# Altium PCB Coil Board.PcbDoc
Units mm, origin at the board's own origin, x right, y up, seen from the top; angles counter-clockwise.
Board outline 280 x 200 mm, 4 copper layers (Layer 1, Layer 2, Layer 3, Layer 4), stack 0.778 mm thick; 140 components, 0 nets, 280 pads, 420 vias.
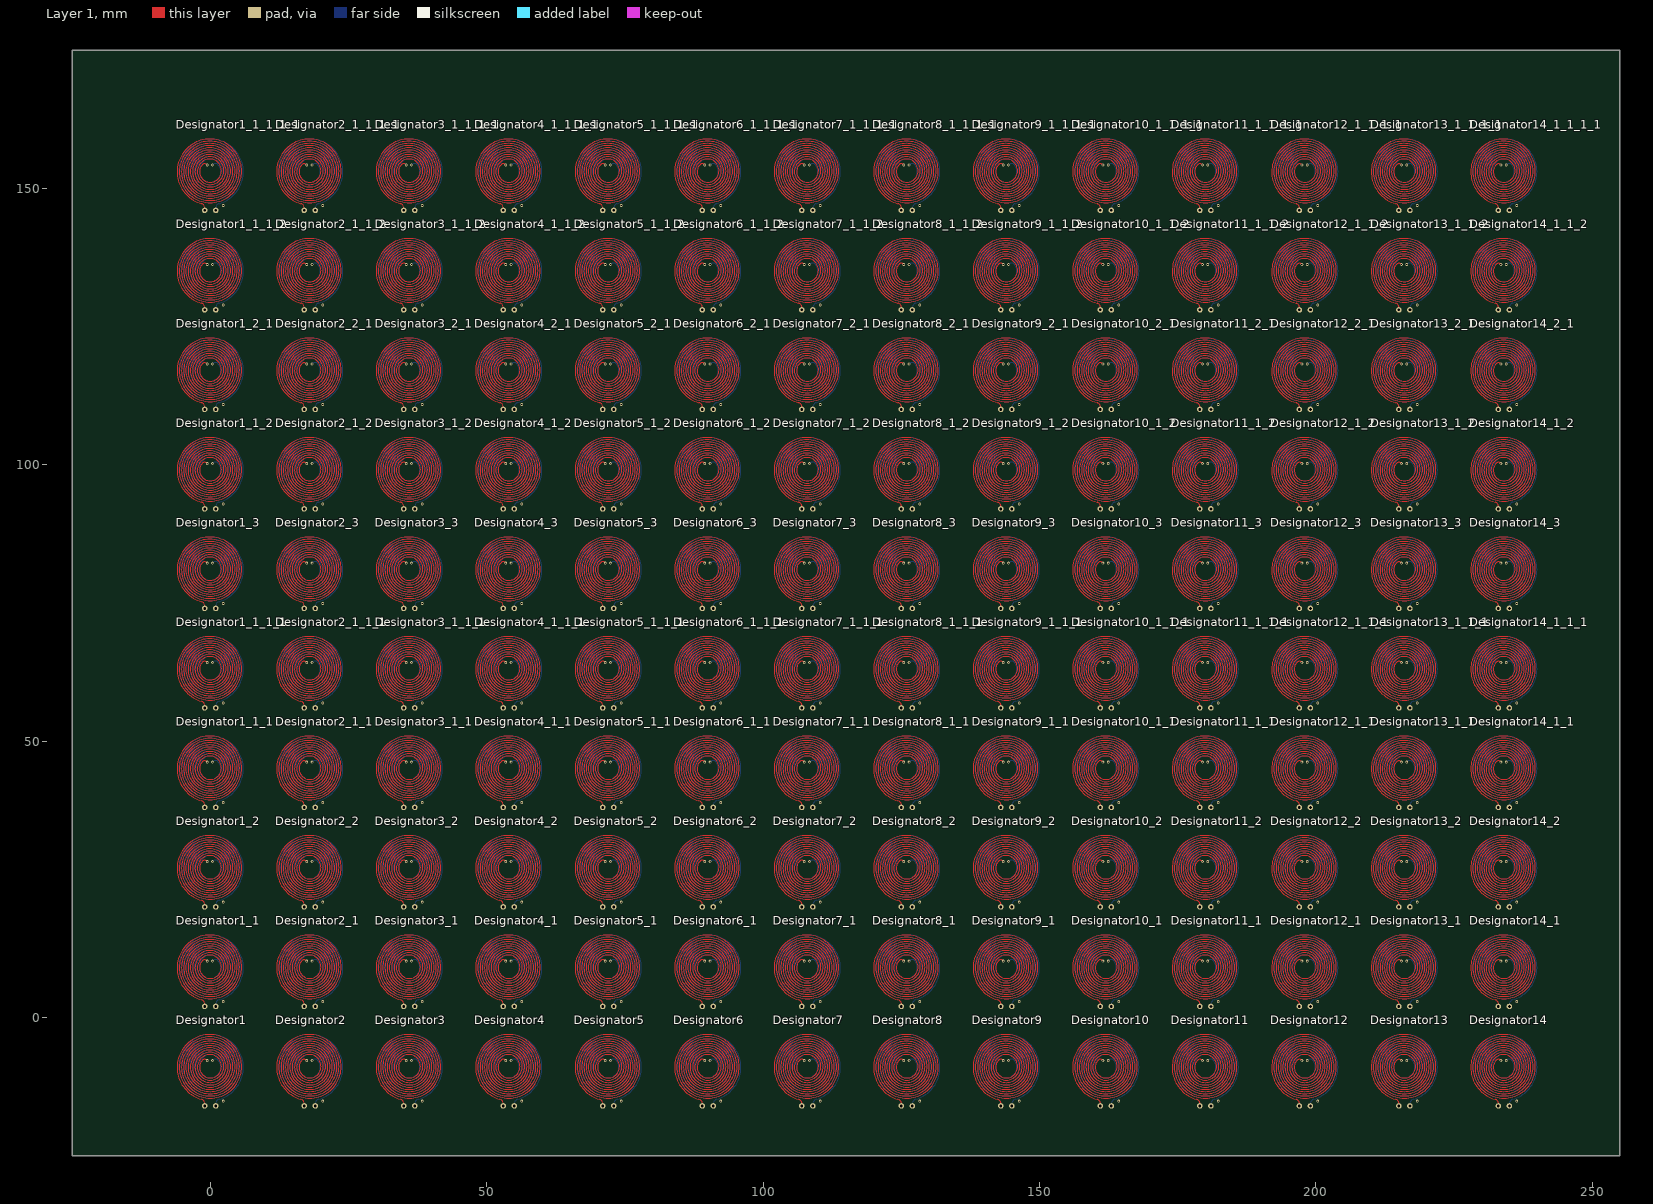
[diagram p0: Layer 1 view]
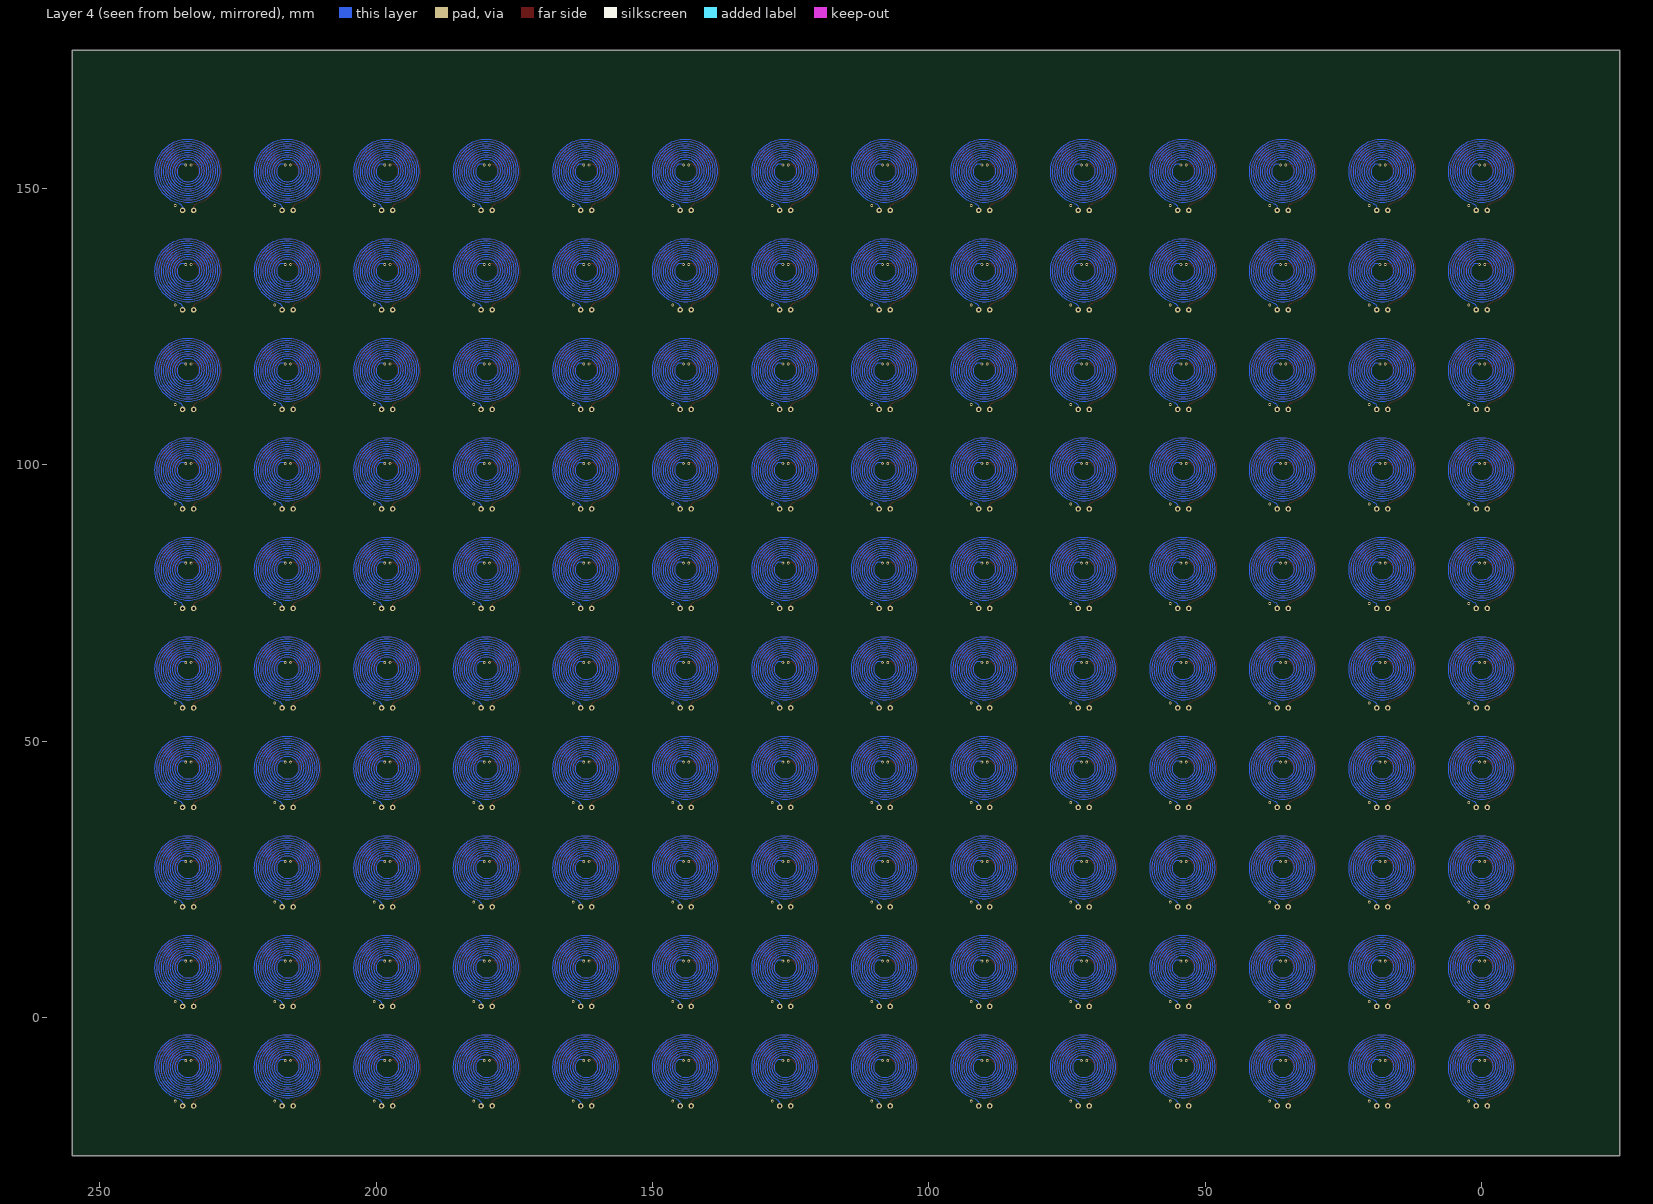
[diagram p1: Layer 4 view, seen from below]
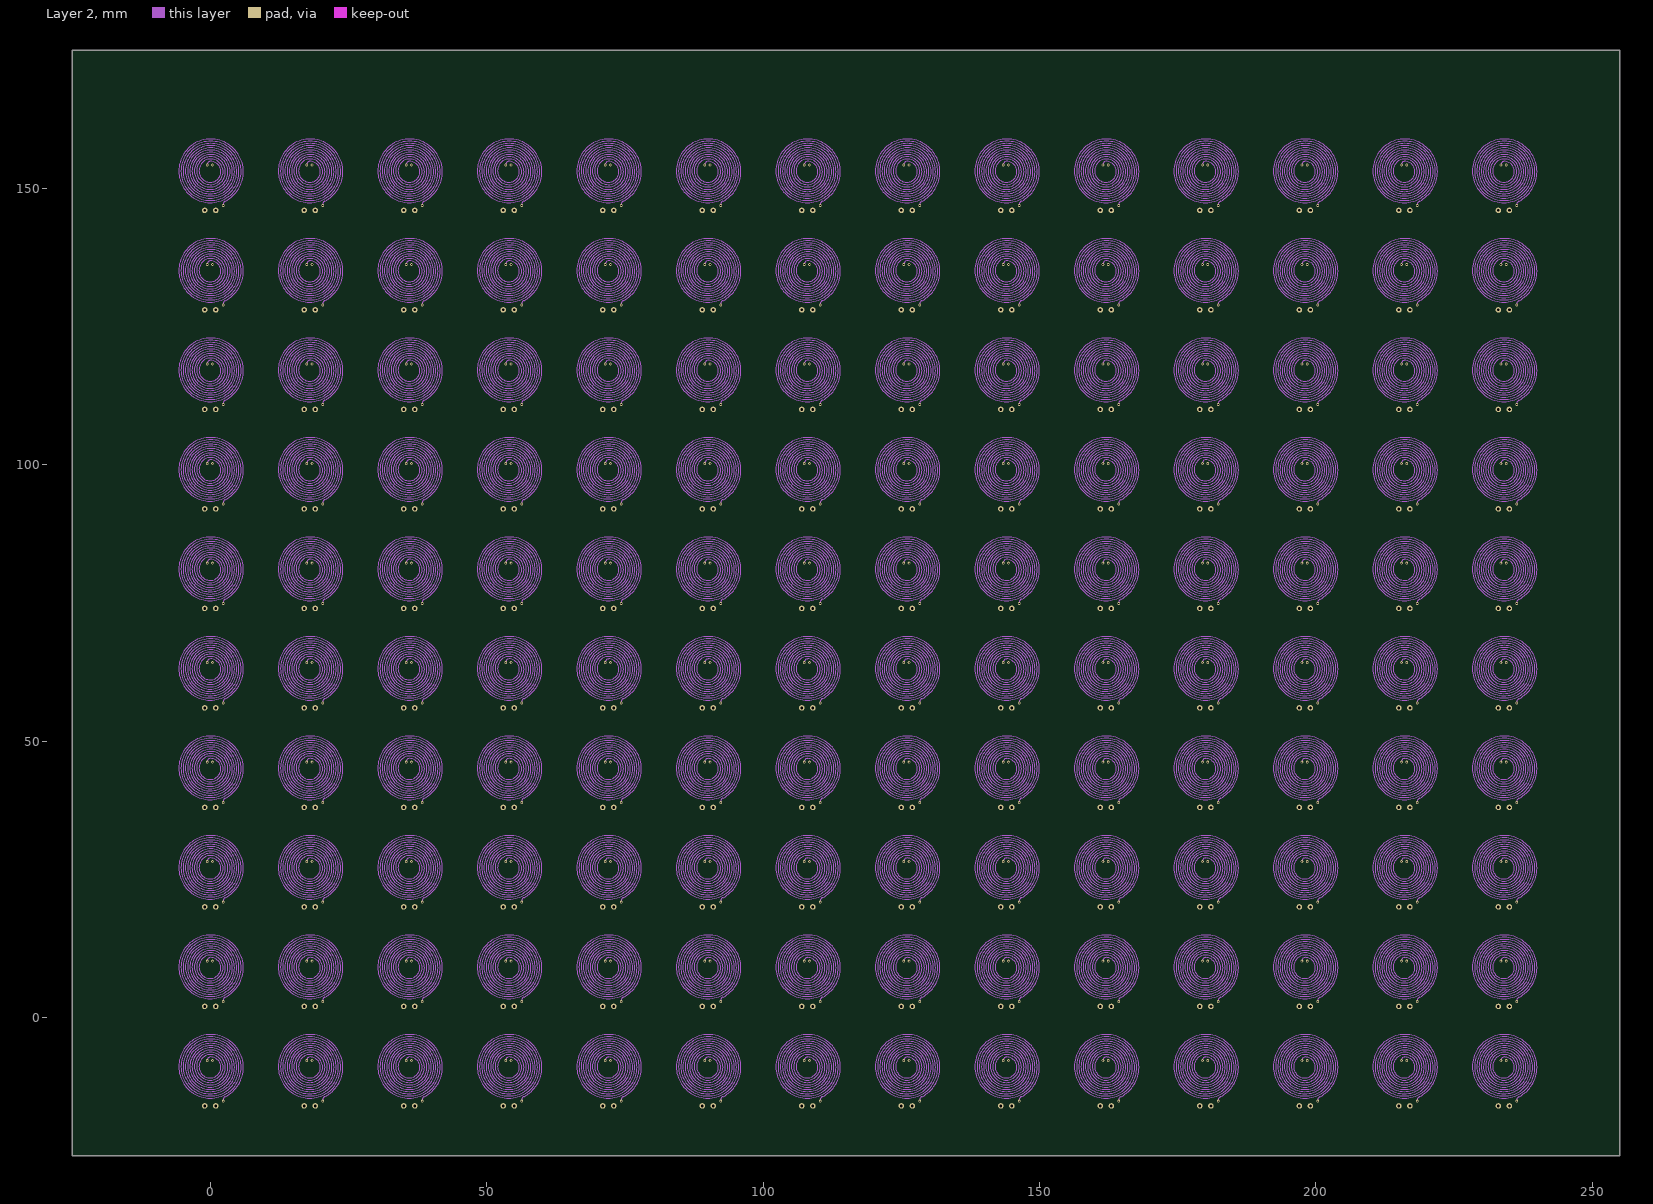
[diagram p2: Layer 2]
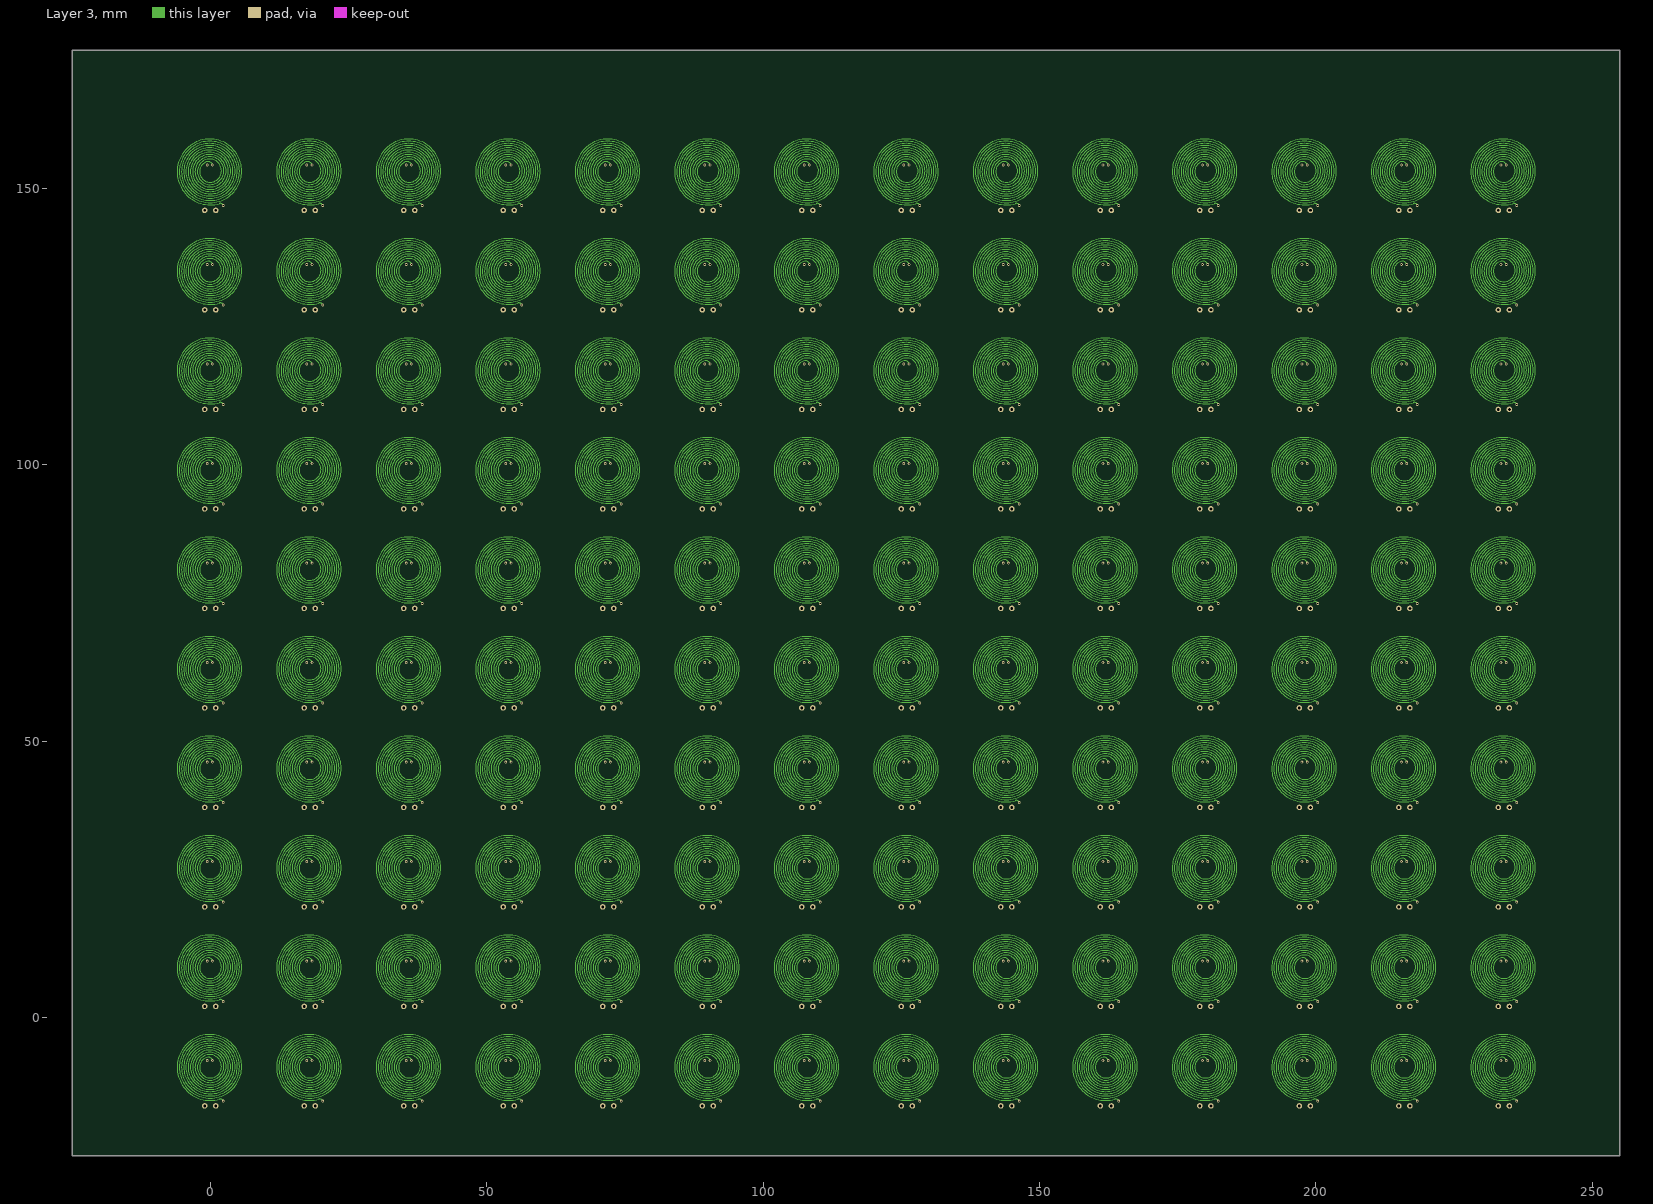
[diagram p3: Layer 3]

## Layer stack, top to bottom
Top Solder: solder mask 0.0102, Solder Resist, Dk 3.5
Layer 1: signal copper 0.0356
Dielectric 1: core 0.254, FR-4, Dk 4.2
Layer 2: signal copper 0.036
Dielectric 3: prepreg 0.127, Dk 4.2
Layer 3: signal copper 0.036
Dielectric 2: core 0.254, Dk 4.2
Layer 4: signal copper 0.0356
Bottom Solder: solder mask 0.0102, Solder Resist, Dk 3.5

## Board outline
-25,-25 255,-25 255,175 -25,175

## Design rules (kind name [scope] priority, off if disabled: settings)
Clearance [All] p1: gap=0.254 ignorepadtopadclearanceinfootprint=FALSE except(0: Arc-Hole Track-Hole SMDPad-Hole THPad-Hole Via-Hole Fill-Hole Poly-Hole Region-Hole Text-Hole)
PolygonConnect [All] p1: connectstyle=Relief reliefconductorwidth=0.254 reliefentries=4 polygonreliefangle="90 Angle" airgapwidth=0.254
RoutingVias [All] p1: holewidth=0.711 width=1.27 viastyle="Through Hole" minholewidth=0.711 minwidth=1.27 maxholewidth=0.711 maxwidth=1.27
SolderMaskExpansion [All] p1: expansion=0.102
Width [All] p1: maxlimit=0.254 minlimit=0.254 preferedwidth=0.254
30 further rules are at their usual default settings.

## Components (designator, comment, footprint, x,y, rotation, side; value= is the part's Value field where it differs from the comment)
Designator1 "Comment" "Planar Coil - 44 Turns (12.5mm)" 0,-9 r0 top
Designator1_1 "Comment" "Planar Coil - 44 Turns (12.5mm)" 0,9 r0 top
Designator1_1_1 "Comment" "Planar Coil - 44 Turns (12.5mm)" 0,45 r0 top
Designator1_1_1_1 "Comment" "Planar Coil - 44 Turns (12.5mm)" 0,63 r0 top
Designator1_1_1_1_1 "Comment" "Planar Coil - 44 Turns (12.5mm)" 0,153 r0 top
Designator1_1_1_2 "Comment" "Planar Coil - 44 Turns (12.5mm)" 0,135 r0 top
Designator1_1_2 "Comment" "Planar Coil - 44 Turns (12.5mm)" 0,99 r0 top
Designator1_2 "Comment" "Planar Coil - 44 Turns (12.5mm)" 0,27 r0 top
Designator1_2_1 "Comment" "Planar Coil - 44 Turns (12.5mm)" 0,117 r0 top
Designator1_3 "Comment" "Planar Coil - 44 Turns (12.5mm)" 0,81 r0 top
Designator2 "Comment" "Planar Coil - 44 Turns (12.5mm)" 18,-9 r0 top
Designator2_1 "Comment" "Planar Coil - 44 Turns (12.5mm)" 18,9 r0 top
Designator2_1_1 "Comment" "Planar Coil - 44 Turns (12.5mm)" 18,45 r0 top
Designator2_1_1_1 "Comment" "Planar Coil - 44 Turns (12.5mm)" 18,63 r0 top
Designator2_1_1_1_1 "Comment" "Planar Coil - 44 Turns (12.5mm)" 18,153 r0 top
Designator2_1_1_2 "Comment" "Planar Coil - 44 Turns (12.5mm)" 18,135 r0 top
Designator2_1_2 "Comment" "Planar Coil - 44 Turns (12.5mm)" 18,99 r0 top
Designator2_2 "Comment" "Planar Coil - 44 Turns (12.5mm)" 18,27 r0 top
Designator2_2_1 "Comment" "Planar Coil - 44 Turns (12.5mm)" 18,117 r0 top
Designator2_3 "Comment" "Planar Coil - 44 Turns (12.5mm)" 18,81 r0 top
Designator3 "Comment" "Planar Coil - 44 Turns (12.5mm)" 36,-9 r0 top
Designator3_1 "Comment" "Planar Coil - 44 Turns (12.5mm)" 36,9 r0 top
Designator3_1_1 "Comment" "Planar Coil - 44 Turns (12.5mm)" 36,45 r0 top
Designator3_1_1_1 "Comment" "Planar Coil - 44 Turns (12.5mm)" 36,63 r0 top
Designator3_1_1_1_1 "Comment" "Planar Coil - 44 Turns (12.5mm)" 36,153 r0 top
Designator3_1_1_2 "Comment" "Planar Coil - 44 Turns (12.5mm)" 36,135 r0 top
Designator3_1_2 "Comment" "Planar Coil - 44 Turns (12.5mm)" 36,99 r0 top
Designator3_2 "Comment" "Planar Coil - 44 Turns (12.5mm)" 36,27 r0 top
Designator3_2_1 "Comment" "Planar Coil - 44 Turns (12.5mm)" 36,117 r0 top
Designator3_3 "Comment" "Planar Coil - 44 Turns (12.5mm)" 36,81 r0 top
Designator4 "Comment" "Planar Coil - 44 Turns (12.5mm)" 54,-9 r0 top
Designator4_1 "Comment" "Planar Coil - 44 Turns (12.5mm)" 54,9 r0 top
Designator4_1_1 "Comment" "Planar Coil - 44 Turns (12.5mm)" 54,45 r0 top
Designator4_1_1_1 "Comment" "Planar Coil - 44 Turns (12.5mm)" 54,63 r0 top
Designator4_1_1_1_1 "Comment" "Planar Coil - 44 Turns (12.5mm)" 54,153 r0 top
Designator4_1_1_2 "Comment" "Planar Coil - 44 Turns (12.5mm)" 54,135 r0 top
Designator4_1_2 "Comment" "Planar Coil - 44 Turns (12.5mm)" 54,99 r0 top
Designator4_2 "Comment" "Planar Coil - 44 Turns (12.5mm)" 54,27 r0 top
Designator4_2_1 "Comment" "Planar Coil - 44 Turns (12.5mm)" 54,117 r0 top
Designator4_3 "Comment" "Planar Coil - 44 Turns (12.5mm)" 54,81 r0 top
Designator5 "Comment" "Planar Coil - 44 Turns (12.5mm)" 72,-9 r0 top
Designator5_1 "Comment" "Planar Coil - 44 Turns (12.5mm)" 72,9 r0 top
Designator5_1_1 "Comment" "Planar Coil - 44 Turns (12.5mm)" 72,45 r0 top
Designator5_1_1_1 "Comment" "Planar Coil - 44 Turns (12.5mm)" 72,63 r0 top
Designator5_1_1_1_1 "Comment" "Planar Coil - 44 Turns (12.5mm)" 72,153 r0 top
Designator5_1_1_2 "Comment" "Planar Coil - 44 Turns (12.5mm)" 72,135 r0 top
Designator5_1_2 "Comment" "Planar Coil - 44 Turns (12.5mm)" 72,99 r0 top
Designator5_2 "Comment" "Planar Coil - 44 Turns (12.5mm)" 72,27 r0 top
Designator5_2_1 "Comment" "Planar Coil - 44 Turns (12.5mm)" 72,117 r0 top
Designator5_3 "Comment" "Planar Coil - 44 Turns (12.5mm)" 72,81 r0 top
Designator6 "Comment" "Planar Coil - 44 Turns (12.5mm)" 90,-9 r0 top
Designator6_1 "Comment" "Planar Coil - 44 Turns (12.5mm)" 90,9 r0 top
Designator6_1_1 "Comment" "Planar Coil - 44 Turns (12.5mm)" 90,45 r0 top
Designator6_1_1_1 "Comment" "Planar Coil - 44 Turns (12.5mm)" 90,63 r0 top
Designator6_1_1_1_1 "Comment" "Planar Coil - 44 Turns (12.5mm)" 90,153 r0 top
Designator6_1_1_2 "Comment" "Planar Coil - 44 Turns (12.5mm)" 90,135 r0 top
Designator6_1_2 "Comment" "Planar Coil - 44 Turns (12.5mm)" 90,99 r0 top
Designator6_2 "Comment" "Planar Coil - 44 Turns (12.5mm)" 90,27 r0 top
Designator6_2_1 "Comment" "Planar Coil - 44 Turns (12.5mm)" 90,117 r0 top
Designator6_3 "Comment" "Planar Coil - 44 Turns (12.5mm)" 90,81 r0 top
Designator7 "Comment" "Planar Coil - 44 Turns (12.5mm)" 108,-9 r0 top
Designator7_1 "Comment" "Planar Coil - 44 Turns (12.5mm)" 108,9 r0 top
Designator7_1_1 "Comment" "Planar Coil - 44 Turns (12.5mm)" 108,45 r0 top
Designator7_1_1_1 "Comment" "Planar Coil - 44 Turns (12.5mm)" 108,63 r0 top
Designator7_1_1_1_1 "Comment" "Planar Coil - 44 Turns (12.5mm)" 108,153 r0 top
Designator7_1_1_2 "Comment" "Planar Coil - 44 Turns (12.5mm)" 108,135 r0 top
Designator7_1_2 "Comment" "Planar Coil - 44 Turns (12.5mm)" 108,99 r0 top
Designator7_2 "Comment" "Planar Coil - 44 Turns (12.5mm)" 108,27 r0 top
Designator7_2_1 "Comment" "Planar Coil - 44 Turns (12.5mm)" 108,117 r0 top
Designator7_3 "Comment" "Planar Coil - 44 Turns (12.5mm)" 108,81 r0 top
Designator8 "Comment" "Planar Coil - 44 Turns (12.5mm)" 126,-9 r0 top
Designator8_1 "Comment" "Planar Coil - 44 Turns (12.5mm)" 126,9 r0 top
Designator8_1_1 "Comment" "Planar Coil - 44 Turns (12.5mm)" 126,45 r0 top
Designator8_1_1_1 "Comment" "Planar Coil - 44 Turns (12.5mm)" 126,63 r0 top
Designator8_1_1_1_1 "Comment" "Planar Coil - 44 Turns (12.5mm)" 126,153 r0 top
Designator8_1_1_2 "Comment" "Planar Coil - 44 Turns (12.5mm)" 126,135 r0 top
Designator8_1_2 "Comment" "Planar Coil - 44 Turns (12.5mm)" 126,99 r0 top
Designator8_2 "Comment" "Planar Coil - 44 Turns (12.5mm)" 126,27 r0 top
Designator8_2_1 "Comment" "Planar Coil - 44 Turns (12.5mm)" 126,117 r0 top
Designator8_3 "Comment" "Planar Coil - 44 Turns (12.5mm)" 126,81 r0 top
Designator9 "Comment" "Planar Coil - 44 Turns (12.5mm)" 144,-9 r0 top
Designator9_1 "Comment" "Planar Coil - 44 Turns (12.5mm)" 144,9 r0 top
Designator9_1_1 "Comment" "Planar Coil - 44 Turns (12.5mm)" 144,45 r0 top
Designator9_1_1_1 "Comment" "Planar Coil - 44 Turns (12.5mm)" 144,63 r0 top
Designator9_1_1_1_1 "Comment" "Planar Coil - 44 Turns (12.5mm)" 144,153 r0 top
Designator9_1_1_2 "Comment" "Planar Coil - 44 Turns (12.5mm)" 144,135 r0 top
Designator9_1_2 "Comment" "Planar Coil - 44 Turns (12.5mm)" 144,99 r0 top
Designator9_2 "Comment" "Planar Coil - 44 Turns (12.5mm)" 144,27 r0 top
Designator9_2_1 "Comment" "Planar Coil - 44 Turns (12.5mm)" 144,117 r0 top
Designator9_3 "Comment" "Planar Coil - 44 Turns (12.5mm)" 144,81 r0 top
Designator10 "Comment" "Planar Coil - 44 Turns (12.5mm)" 162,-9 r0 top
Designator10_1 "Comment" "Planar Coil - 44 Turns (12.5mm)" 162,9 r0 top
Designator10_1_1 "Comment" "Planar Coil - 44 Turns (12.5mm)" 162,45 r0 top
Designator10_1_1_1 "Comment" "Planar Coil - 44 Turns (12.5mm)" 162,63 r0 top
Designator10_1_1_1_1 "Comment" "Planar Coil - 44 Turns (12.5mm)" 162,153 r0 top
Designator10_1_1_2 "Comment" "Planar Coil - 44 Turns (12.5mm)" 162,135 r0 top
Designator10_1_2 "Comment" "Planar Coil - 44 Turns (12.5mm)" 162,99 r0 top
Designator10_2 "Comment" "Planar Coil - 44 Turns (12.5mm)" 162,27 r0 top
Designator10_2_1 "Comment" "Planar Coil - 44 Turns (12.5mm)" 162,117 r0 top
Designator10_3 "Comment" "Planar Coil - 44 Turns (12.5mm)" 162,81 r0 top
Designator11 "Comment" "Planar Coil - 44 Turns (12.5mm)" 180,-9 r0 top
Designator11_1 "Comment" "Planar Coil - 44 Turns (12.5mm)" 180,9 r0 top
Designator11_1_1 "Comment" "Planar Coil - 44 Turns (12.5mm)" 180,45 r0 top
Designator11_1_1_1 "Comment" "Planar Coil - 44 Turns (12.5mm)" 180,63 r0 top
Designator11_1_1_1_1 "Comment" "Planar Coil - 44 Turns (12.5mm)" 180,153 r0 top
Designator11_1_1_2 "Comment" "Planar Coil - 44 Turns (12.5mm)" 180,135 r0 top
Designator11_1_2 "Comment" "Planar Coil - 44 Turns (12.5mm)" 180,99 r0 top
Designator11_2 "Comment" "Planar Coil - 44 Turns (12.5mm)" 180,27 r0 top
Designator11_2_1 "Comment" "Planar Coil - 44 Turns (12.5mm)" 180,117 r0 top
Designator11_3 "Comment" "Planar Coil - 44 Turns (12.5mm)" 180,81 r0 top
Designator12 "Comment" "Planar Coil - 44 Turns (12.5mm)" 198,-9 r0 top
Designator12_1 "Comment" "Planar Coil - 44 Turns (12.5mm)" 198,9 r0 top
Designator12_1_1 "Comment" "Planar Coil - 44 Turns (12.5mm)" 198,45 r0 top
Designator12_1_1_1 "Comment" "Planar Coil - 44 Turns (12.5mm)" 198,63 r0 top
Designator12_1_1_1_1 "Comment" "Planar Coil - 44 Turns (12.5mm)" 198,153 r0 top
Designator12_1_1_2 "Comment" "Planar Coil - 44 Turns (12.5mm)" 198,135 r0 top
Designator12_1_2 "Comment" "Planar Coil - 44 Turns (12.5mm)" 198,99 r0 top
Designator12_2 "Comment" "Planar Coil - 44 Turns (12.5mm)" 198,27 r0 top
Designator12_2_1 "Comment" "Planar Coil - 44 Turns (12.5mm)" 198,117 r0 top
Designator12_3 "Comment" "Planar Coil - 44 Turns (12.5mm)" 198,81 r0 top
Designator13 "Comment" "Planar Coil - 44 Turns (12.5mm)" 216,-9 r0 top
Designator13_1 "Comment" "Planar Coil - 44 Turns (12.5mm)" 216,9 r0 top
Designator13_1_1 "Comment" "Planar Coil - 44 Turns (12.5mm)" 216,45 r0 top
Designator13_1_1_1 "Comment" "Planar Coil - 44 Turns (12.5mm)" 216,63 r0 top
Designator13_1_1_1_1 "Comment" "Planar Coil - 44 Turns (12.5mm)" 216,153 r0 top
Designator13_1_1_2 "Comment" "Planar Coil - 44 Turns (12.5mm)" 216,135 r0 top
Designator13_1_2 "Comment" "Planar Coil - 44 Turns (12.5mm)" 216,99 r0 top
Designator13_2 "Comment" "Planar Coil - 44 Turns (12.5mm)" 216,27 r0 top
Designator13_2_1 "Comment" "Planar Coil - 44 Turns (12.5mm)" 216,117 r0 top
Designator13_3 "Comment" "Planar Coil - 44 Turns (12.5mm)" 216,81 r0 top
Designator14 "Comment" "Planar Coil - 44 Turns (12.5mm)" 234,-9 r0 top
Designator14_1 "Comment" "Planar Coil - 44 Turns (12.5mm)" 234,9 r0 top
Designator14_1_1 "Comment" "Planar Coil - 44 Turns (12.5mm)" 234,45 r0 top
Designator14_1_1_1 "Comment" "Planar Coil - 44 Turns (12.5mm)" 234,63 r0 top
Designator14_1_1_1_1 "Comment" "Planar Coil - 44 Turns (12.5mm)" 234,153 r0 top
Designator14_1_1_2 "Comment" "Planar Coil - 44 Turns (12.5mm)" 234,135 r0 top
Designator14_1_2 "Comment" "Planar Coil - 44 Turns (12.5mm)" 234,99 r0 top
Designator14_2 "Comment" "Planar Coil - 44 Turns (12.5mm)" 234,27 r0 top
Designator14_2_1 "Comment" "Planar Coil - 44 Turns (12.5mm)" 234,117 r0 top
Designator14_3 "Comment" "Planar Coil - 44 Turns (12.5mm)" 234,81 r0 top

## Footprints (in the part's own frame and the unit in brackets; to place one, negate y for a bottom-side part, rotate by r counter-clockwise, add the part's x,y. Pads: shape width x height; smd on the part's side, far side on the other; paste and mask are expansions set on the pad)
"Planar Coil - 44 Turns (12.5mm)" [mm]
  round 1 hole 0.5: 1(-1,-7) 2(1,-7)
  Layer 1 lines w0.2: -1,-7 ccw(c-1.906,-6.69) -1.596,-5.784 cw(c0,0) -6,0 cw(c-0.1,0) -0.1,5.9 cw(c-0.1,0.1) 5.7,0.1 cw(c0,0.1) 0,-5.6 cw(c0,0) -5.6,0 cw(c-0.1,0) -0.1,5.5 cw(c-0.1,0.1) 5.3,0.1 cw(c0,0.1) 0,-5.2 cw(c0,0) -5.2,0 cw(c-0.1,0) -0.1,5.1 cw(c-0.1,0.1) 4.9,0.1 cw(c0,0.1) 0,-4.8 cw(c0,0) -4.8,0 cw(c-0.1,0) -0.1,4.7 cw(c-0.1,0.1) 4.5,0.1 cw(c0,0.1) 0,-4.4 cw(c0,0) -4.4,0 cw(c-0.1,0) -0.1,4.3 cw(c-0.1,0.1) 4.1,0.1 cw(c0,0.1) 0,-4 cw(c0,0) -4,0 cw(c-0.1,0) -0.1,3.9 cw(c-0.1,0.1) 3.7,0.1 cw(c0,0.1) 0,-3.6 cw(c0,0) -3.6,0 cw(c-0.1,0) -0.1,3.5 cw(c-0.1,0.1) 3.3,0.1 cw(c0,0.1) 0,-3.2 cw(c0,0) -3.2,0 cw(c-0.1,0) -0.119,3.1 cw(c-0.11,0.11) 2.88,0.12 cw(c0,0.12) 0,-2.76 cw(c0,0) -2.76,0 cw(c-0.06,0) -0.06,2.7 cw(c-0.06,0.18) 2.46,0.18 cw(c-0.03,0.15) 0,-2.34 cw(c0,0) -2.34,0 cw(c-0.06,0) -0.06,2.28 cw(c-0.09,0.15) 2.04,0.12 cw(c0,0.12) 0,-1.92 cw(c0,0) -1.92,0 cw(c-0.06,0) -1.404,1.286 cw(c-1.015,0.811) -0.54,1.2
  Layer 2 lines w0.2: -0.54,1.2 cw(c0.09,1.23) 0.06,1.86 cw(c0.06,0) 1.92,0 cw(c0,0) 0,-1.92 cw(c0,0.12) -2.04,0.12 cw(c0.09,0.15) 0.06,2.28 cw(c0.06,0) 2.34,0 cw(c0,0) 0,-2.34 cw(c0.03,0.15) -2.46,0.18 cw(c0.06,0.18) 0.06,2.7 cw(c0.06,0) 2.76,0 cw(c0,0) 0,-2.76 cw(c0,0.12) -2.88,0.12 cw(c0.11,0.11) 0.119,3.1 cw(c0.1,0) 3.2,0 cw(c0,0) 0,-3.2 cw(c0,0.1) -3.3,0.1 cw(c0.1,0.1) 0.1,3.5 cw(c0.1,0) 3.6,0 cw(c0,0) 0,-3.6 cw(c0,0.1) -3.7,0.1 cw(c0.1,0.1) 0.1,3.9 cw(c0.1,0) 4,0 cw(c0,0) 0,-4 cw(c0,0.1) -4.1,0.1 cw(c0.1,0.1) 0.1,4.3 cw(c0.1,0) 4.4,0 cw(c0,0) 0,-4.4 cw(c0,0.1) -4.5,0.1 cw(c0.1,0.1) 0.1,4.7 cw(c0.1,0) 4.8,0 cw(c0,0) 0,-4.8 cw(c0,0.1) -4.9,0.1 cw(c0.1,0.1) 0.1,5.1 cw(c0.1,0) 5.2,0 cw(c0,0) 0,-5.2 cw(c0,0.1) -5.3,0.1 cw(c0.1,0.1) 0.1,5.5 cw(c0.1,0) 5.6,0 cw(c0,0) 0,-5.6 cw(c0,0.1) -5.7,0.1 cw(c0.1,0.1) 0.1,5.9 cw(c0.1,0) 6,0 cw(c0,0) 2.757,-5.329 ccw(c2.944,-5.933) 2.34,-6.12
  Layer 3 lines w0.2: -0.483,1.811 ccw(c-0.06,0) -1.92,0 ccw(c0,0) 0,-1.92 ccw(c0,0.12) 2.04,0.12 ccw(c-0.09,0.15) -0.06,2.28 ccw(c-0.06,0) -2.34,0 ccw(c0,0) 0,-2.34 ccw(c-0.03,0.15) 2.46,0.18 ccw(c-0.06,0.18) -0.06,2.7 ccw(c-0.06,0) -2.76,0 ccw(c0,0) 0,-2.76 ccw(c0,0.12) 2.88,0.12 ccw(c-0.11,0.11) -0.119,3.1 ccw(c-0.1,0) -3.2,0 ccw(c0,0) 0,-3.2 ccw(c0,0.1) 3.3,0.1 ccw(c-0.1,0.1) -0.1,3.5 ccw(c-0.1,0) -3.6,0 ccw(c0,0) 0,-3.6 ccw(c0,0.1) 3.7,0.1 ccw(c-0.1,0.1) -0.1,3.9 ccw(c-0.1,0) -4,0 ccw(c0,0) 0,-4 ccw(c0,0.1) 4.1,0.1 ccw(c-0.1,0.1) -0.1,4.3 ccw(c-0.1,0) -4.4,0 ccw(c0,0) 0,-4.4 ccw(c0,0.1) 4.5,0.1 ccw(c-0.1,0.1) -0.1,4.7 ccw(c-0.1,0) -4.8,0 ccw(c0,0) 0,-4.8 ccw(c0,0.1) 4.9,0.1 ccw(c-0.1,0.1) -0.1,5.1 ccw(c-0.1,0) -5.2,0 ccw(c0,0) 0,-5.2 ccw(c0,0.1) 5.3,0.1 ccw(c-0.1,0.1) -0.1,5.5 ccw(c-0.1,0) -5.6,0 ccw(c0,0) 0,-5.6 ccw(c0,0.1) 5.7,0.1 ccw(c-0.1,0.1) -0.1,5.9 ccw(c-0.1,0) -6,0 ccw(c0,0) 1.648,-5.769 cw(c1.819,-6.29) 2.34,-6.12 ; -0.48,1.8 cw(c-0.33,1.05) 0.42,1.2
  Layer 4 lines w0.2: 0.42,1.2 cw(c0.955,0.809) 1.346,1.344 cw(c0.06,0) 1.92,0 cw(c0,0) 0,-1.92 cw(c0,0.12) -2.04,0.12 cw(c0.09,0.15) 0.06,2.28 cw(c0.06,0) 2.34,0 cw(c0,0) 0,-2.34 cw(c0.03,0.15) -2.46,0.18 cw(c0.06,0.18) 0.06,2.7 cw(c0.06,0) 2.76,0 cw(c0,0) 0,-2.76 cw(c0,0.12) -2.88,0.12 cw(c0.11,0.11) 0.119,3.1 cw(c0.1,0) 3.2,0 cw(c0,0) 0,-3.2 cw(c0,0.1) -3.3,0.1 cw(c0.1,0.1) 0.1,3.5 cw(c0.1,0) 3.6,0 cw(c0,0) 0,-3.6 cw(c0,0.1) -3.7,0.1 cw(c0.1,0.1) 0.1,3.9 cw(c0.1,0) 4,0 cw(c0,0) 0,-4 cw(c0,0.1) -4.1,0.1 cw(c0.1,0.1) 0.1,4.3 cw(c0.1,0) 4.4,0 cw(c0,0) 0,-4.4 cw(c0,0.1) -4.5,0.1 cw(c0.1,0.1) 0.1,4.7 cw(c0.1,0) 4.8,0 cw(c0,0) 0,-4.8 cw(c0,0.1) -4.9,0.1 cw(c0.1,0.1) 0.1,5.1 cw(c0.1,0) 5.2,0 cw(c0,0) 0,-5.2 cw(c0,0.1) -5.3,0.1 cw(c0.1,0.1) 0.1,5.5 cw(c0.1,0) 5.6,0 cw(c0,0) 0,-5.6 cw(c0,0.1) -5.7,0.1 cw(c0.1,0.1) 0.1,5.9 cw(c0.1,0) 6,0 cw(c0,0) 1.596,-5.784 ccw(c1.906,-6.69) 1,-7

## Via types
v1: diameter 0.508, hole 0.254, Layer 1 to Layer 4, 420 vias

## Nets (pads, with @x,y where several pads share a name; then routed paths per layer and width w, separated by ;. In a path a pad name is that pad's centre, name@x,y a point inside that pad or via, vN(x,y) a via of type N, cw(c..) or ccw(c..) an arc to the next point about the centre after c; other vN are vias at no path point)
pads on no net: Designator1.1 Designator1.2 Designator1_1.1 Designator1_1.2 Designator1_1_1.1 Designator1_1_1.2 Designator1_1_1_1.1 Designator1_1_1_1.2 Designator1_1_1_1_1.1 Designator1_1_1_1_1.2 Designator1_1_1_2.1 Designator1_1_1_2.2 Designator1_1_2.1 Designator1_1_2.2 Designator1_2.1 Designator1_2.2 Designator1_2_1.1 Designator1_2_1.2 Designator1_3.1 Designator1_3.2 Designator2.1 Designator2.2 Designator2_1.1 Designator2_1.2 Designator2_1_1.1 Designator2_1_1.2 Designator2_1_1_1.1 Designator2_1_1_1.2 Designator2_1_1_1_1.1 Designator2_1_1_1_1.2 Designator2_1_1_2.1 Designator2_1_1_2.2 Designator2_1_2.1 Designator2_1_2.2 Designator2_2.1 Designator2_2.2 Designator2_2_1.1 Designator2_2_1.2 Designator2_3.1 Designator2_3.2 Designator3.1 Designator3.2 Designator3_1.1 Designator3_1.2 Designator3_1_1.1 Designator3_1_1.2 Designator3_1_1_1.1 Designator3_1_1_1.2 Designator3_1_1_1_1.1 Designator3_1_1_1_1.2 Designator3_1_1_2.1 Designator3_1_1_2.2 Designator3_1_2.1 Designator3_1_2.2 Designator3_2.1 Designator3_2.2 Designator3_2_1.1 Designator3_2_1.2 Designator3_3.1 Designator3_3.2 Designator4.1 Designator4.2 Designator4_1.1 Designator4_1.2 Designator4_1_1.1 Designator4_1_1.2 Designator4_1_1_1.1 Designator4_1_1_1.2 Designator4_1_1_1_1.1 Designator4_1_1_1_1.2 Designator4_1_1_2.1 Designator4_1_1_2.2 Designator4_1_2.1 Designator4_1_2.2 Designator4_2.1 Designator4_2.2 Designator4_2_1.1 Designator4_2_1.2 Designator4_3.1 Designator4_3.2 Designator5.1 Designator5.2 Designator5_1.1 Designator5_1.2 Designator5_1_1.1 Designator5_1_1.2 Designator5_1_1_1.1 Designator5_1_1_1.2 Designator5_1_1_1_1.1 Designator5_1_1_1_1.2 Designator5_1_1_2.1 Designator5_1_1_2.2 Designator5_1_2.1 Designator5_1_2.2 Designator5_2.1 Designator5_2.2 Designator5_2_1.1 Designator5_2_1.2 Designator5_3.1 Designator5_3.2 Designator6.1 Designator6.2 Designator6_1.1 Designator6_1.2 Designator6_1_1.1 Designator6_1_1.2 Designator6_1_1_1.1 Designator6_1_1_1.2 Designator6_1_1_1_1.1 Designator6_1_1_1_1.2 Designator6_1_1_2.1 Designator6_1_1_2.2 Designator6_1_2.1 Designator6_1_2.2 Designator6_2.1 Designator6_2.2 Designator6_2_1.1 Designator6_2_1.2 Designator6_3.1 Designator6_3.2 Designator7.1 Designator7.2 Designator7_1.1 Designator7_1.2 Designator7_1_1.1 Designator7_1_1.2 Designator7_1_1_1.1 Designator7_1_1_1.2 Designator7_1_1_1_1.1 Designator7_1_1_1_1.2 Designator7_1_1_2.1 Designator7_1_1_2.2 Designator7_1_2.1 Designator7_1_2.2 Designator7_2.1 Designator7_2.2 Designator7_2_1.1 Designator7_2_1.2 Designator7_3.1 Designator7_3.2 Designator8.1 Designator8.2 Designator8_1.1 Designator8_1.2 Designator8_1_1.1 Designator8_1_1.2 Designator8_1_1_1.1 Designator8_1_1_1.2 Designator8_1_1_1_1.1 Designator8_1_1_1_1.2 Designator8_1_1_2.1 Designator8_1_1_2.2 Designator8_1_2.1 Designator8_1_2.2 Designator8_2.1 Designator8_2.2 Designator8_2_1.1 Designator8_2_1.2 Designator8_3.1 Designator8_3.2 Designator9.1 Designator9.2 Designator9_1.1 Designator9_1.2 Designator9_1_1.1 Designator9_1_1.2 Designator9_1_1_1.1 Designator9_1_1_1.2 Designator9_1_1_1_1.1 Designator9_1_1_1_1.2 Designator9_1_1_2.1 Designator9_1_1_2.2 Designator9_1_2.1 Designator9_1_2.2 Designator9_2.1 Designator9_2.2 Designator9_2_1.1 Designator9_2_1.2 Designator9_3.1 Designator9_3.2 Designator10.1 Designator10.2 Designator10_1.1 Designator10_1.2 Designator10_1_1.1 Designator10_1_1.2 Designator10_1_1_1.1 Designator10_1_1_1.2 Designator10_1_1_1_1.1 Designator10_1_1_1_1.2 Designator10_1_1_2.1 Designator10_1_1_2.2 Designator10_1_2.1 Designator10_1_2.2 Designator10_2.1 Designator10_2.2 Designator10_2_1.1 Designator10_2_1.2 Designator10_3.1 Designator10_3.2 Designator11.1 Designator11.2 Designator11_1.1 Designator11_1.2 Designator11_1_1.1 Designator11_1_1.2 Designator11_1_1_1.1 Designator11_1_1_1.2 Designator11_1_1_1_1.1 Designator11_1_1_1_1.2 Designator11_1_1_2.1 Designator11_1_1_2.2 Designator11_1_2.1 Designator11_1_2.2 Designator11_2.1 Designator11_2.2 Designator11_2_1.1 Designator11_2_1.2 Designator11_3.1 Designator11_3.2 Designator12.1 Designator12.2 Designator12_1.1 Designator12_1.2 Designator12_1_1.1 Designator12_1_1.2 Designator12_1_1_1.1 Designator12_1_1_1.2 Designator12_1_1_1_1.1 Designator12_1_1_1_1.2 Designator12_1_1_2.1 Designator12_1_1_2.2 Designator12_1_2.1 Designator12_1_2.2 Designator12_2.1 Designator12_2.2 Designator12_2_1.1 Designator12_2_1.2 Designator12_3.1 Designator12_3.2 Designator13.1 Designator13.2 Designator13_1.1 Designator13_1.2 Designator13_1_1.1 Designator13_1_1.2 Designator13_1_1_1.1 Designator13_1_1_1.2 Designator13_1_1_1_1.1 Designator13_1_1_1_1.2 Designator13_1_1_2.1 Designator13_1_1_2.2 Designator13_1_2.1 Designator13_1_2.2 Designator13_2.1 Designator13_2.2 Designator13_2_1.1 Designator13_2_1.2 Designator13_3.1 Designator13_3.2 Designator14.1 Designator14.2 Designator14_1.1 Designator14_1.2 Designator14_1_1.1 Designator14_1_1.2 Designator14_1_1_1.1 Designator14_1_1_1.2 Designator14_1_1_1_1.1 Designator14_1_1_1_1.2 Designator14_1_1_2.1 Designator14_1_1_2.2 Designator14_1_2.1 Designator14_1_2.2 Designator14_2.1 Designator14_2.2 Designator14_2_1.1 Designator14_2_1.2 Designator14_3.1 Designator14_3.2
copper on no net:
  other v1: 2.34,-15.12 20.34,-15.12 38.34,-15.12 56.34,-15.12 74.34,-15.12 92.34,-15.12 110.34,-15.12 128.34,-15.12 146.34,-15.12 164.34,-15.12 182.34,-15.12 200.34,-15.12 218.34,-15.12 236.34,-15.12 -0.54,-7.8 0.42,-7.8 17.46,-7.8 18.42,-7.8 35.46,-7.8 36.42,-7.8 53.46,-7.8 54.42,-7.8 71.46,-7.8 72.42,-7.8 89.46,-7.8 90.42,-7.8 107.46,-7.8 108.42,-7.8 125.46,-7.8 126.42,-7.8 143.46,-7.8 144.42,-7.8 161.46,-7.8 162.42,-7.8 179.46,-7.8 180.42,-7.8 197.46,-7.8 198.42,-7.8 215.46,-7.8 216.42,-7.8 233.46,-7.8 234.42,-7.8 2.34,2.88 20.34,2.88 38.34,2.88 56.34,2.88 74.34,2.88 92.34,2.88 110.34,2.88 128.34,2.88 146.34,2.88 164.34,2.88 182.34,2.88 200.34,2.88 218.34,2.88 236.34,2.88 -0.54,10.2 0.42,10.2 17.46,10.2 18.42,10.2 35.46,10.2 36.42,10.2 53.46,10.2 54.42,10.2 71.46,10.2 72.42,10.2 89.46,10.2 90.42,10.2 107.46,10.2 108.42,10.2 125.46,10.2 126.42,10.2 143.46,10.2 144.42,10.2 161.46,10.2 162.42,10.2 179.46,10.2 180.42,10.2 197.46,10.2 198.42,10.2 215.46,10.2 216.42,10.2 233.46,10.2 234.42,10.2 2.34,20.88 20.34,20.88 38.34,20.88 56.34,20.88 74.34,20.88 92.34,20.88 110.34,20.88 128.34,20.88 146.34,20.88 164.34,20.88 182.34,20.88 200.34,20.88 218.34,20.88 236.34,20.88 -0.54,28.2 0.42,28.2 17.46,28.2 18.42,28.2 35.46,28.2 36.42,28.2 53.46,28.2 54.42,28.2 71.46,28.2 72.42,28.2 89.46,28.2 90.42,28.2 107.46,28.2 108.42,28.2 125.46,28.2 126.42,28.2 143.46,28.2 144.42,28.2 161.46,28.2 162.42,28.2 179.46,28.2 180.42,28.2 197.46,28.2 198.42,28.2 215.46,28.2 216.42,28.2 233.46,28.2 234.42,28.2 2.34,38.88 20.34,38.88 38.34,38.88 56.34,38.88 74.34,38.88 92.34,38.88 110.34,38.88 128.34,38.88 146.34,38.88 164.34,38.88 182.34,38.88 200.34,38.88 218.34,38.88 236.34,38.88 -0.54,46.2 0.42,46.2 17.46,46.2 18.42,46.2 35.46,46.2 36.42,46.2 53.46,46.2 54.42,46.2 71.46,46.2 72.42,46.2 89.46,46.2 90.42,46.2 107.46,46.2 108.42,46.2 125.46,46.2 126.42,46.2 143.46,46.2 144.42,46.2 161.46,46.2 162.42,46.2 179.46,46.2 180.42,46.2 197.46,46.2 198.42,46.2 215.46,46.2 216.42,46.2 233.46,46.2 234.42,46.2 2.34,56.88 20.34,56.88 38.34,56.88 56.34,56.88 74.34,56.88 92.34,56.88 110.34,56.88 128.34,56.88 146.34,56.88 164.34,56.88 182.34,56.88 200.34,56.88 218.34,56.88 236.34,56.88 -0.54,64.2 0.42,64.2 17.46,64.2 18.42,64.2 35.46,64.2 36.42,64.2 53.46,64.2 54.42,64.2 71.46,64.2 72.42,64.2 89.46,64.2 90.42,64.2 107.46,64.2 108.42,64.2 125.46,64.2 126.42,64.2 143.46,64.2 144.42,64.2 161.46,64.2 162.42,64.2 179.46,64.2 180.42,64.2 197.46,64.2 198.42,64.2 215.46,64.2 216.42,64.2 233.46,64.2 234.42,64.2 2.34,74.88 20.34,74.88 38.34,74.88 56.34,74.88 74.34,74.88 92.34,74.88 110.34,74.88 128.34,74.88 146.34,74.88 164.34,74.88 182.34,74.88 200.34,74.88 218.34,74.88 236.34,74.88 -0.54,82.2 0.42,82.2 17.46,82.2 18.42,82.2 35.46,82.2 36.42,82.2 53.46,82.2 54.42,82.2 71.46,82.2 72.42,82.2 89.46,82.2 90.42,82.2 107.46,82.2 108.42,82.2 125.46,82.2 126.42,82.2 143.46,82.2 144.42,82.2 161.46,82.2 162.42,82.2 179.46,82.2 180.42,82.2 197.46,82.2 198.42,82.2 215.46,82.2 216.42,82.2 233.46,82.2 234.42,82.2 2.34,92.88 20.34,92.88 38.34,92.88 56.34,92.88 74.34,92.88 92.34,92.88 110.34,92.88 128.34,92.88 146.34,92.88 164.34,92.88 182.34,92.88 200.34,92.88 218.34,92.88 236.34,92.88 -0.54,100.2 0.42,100.2 17.46,100.2 18.42,100.2 35.46,100.2 36.42,100.2 53.46,100.2 54.42,100.2 71.46,100.2 72.42,100.2 89.46,100.2 90.42,100.2 107.46,100.2 108.42,100.2 125.46,100.2 126.42,100.2 143.46,100.2 144.42,100.2 161.46,100.2 162.42,100.2 179.46,100.2 180.42,100.2 197.46,100.2 198.42,100.2 215.46,100.2 216.42,100.2 233.46,100.2 234.42,100.2 2.34,110.88 20.34,110.88 38.34,110.88 56.34,110.88 74.34,110.88 92.34,110.88 110.34,110.88 128.34,110.88 146.34,110.88 164.34,110.88 182.34,110.88 200.34,110.88 218.34,110.88 236.34,110.88 -0.54,118.2 0.42,118.2 17.46,118.2 18.42,118.2 35.46,118.2 36.42,118.2 53.46,118.2 54.42,118.2 71.46,118.2 72.42,118.2 89.46,118.2 90.42,118.2 107.46,118.2 108.42,118.2 125.46,118.2 126.42,118.2 143.46,118.2 144.42,118.2 161.46,118.2 162.42,118.2 179.46,118.2 180.42,118.2 197.46,118.2 198.42,118.2 215.46,118.2 216.42,118.2 233.46,118.2 234.42,118.2 2.34,128.88 20.34,128.88 38.34,128.88 56.34,128.88 74.34,128.88 92.34,128.88 110.34,128.88 128.34,128.88 146.34,128.88 164.34,128.88 182.34,128.88 200.34,128.88 218.34,128.88 236.34,128.88 -0.54,136.2 0.42,136.2 17.46,136.2 18.42,136.2 35.46,136.2 36.42,136.2 53.46,136.2 54.42,136.2 71.46,136.2 72.42,136.2 89.46,136.2 90.42,136.2 107.46,136.2 108.42,136.2 125.46,136.2 126.42,136.2 143.46,136.2 144.42,136.2 161.46,136.2 162.42,136.2 179.46,136.2 180.42,136.2 197.46,136.2 198.42,136.2 215.46,136.2 216.42,136.2 233.46,136.2 234.42,136.2 2.34,146.88 20.34,146.88 38.34,146.88 56.34,146.88 74.34,146.88 92.34,146.88 110.34,146.88 128.34,146.88 146.34,146.88 164.34,146.88 182.34,146.88 200.34,146.88 218.34,146.88 236.34,146.88 -0.54,154.2 0.42,154.2 17.46,154.2 18.42,154.2 35.46,154.2 36.42,154.2 53.46,154.2 54.42,154.2 71.46,154.2 72.42,154.2 89.46,154.2 90.42,154.2 107.46,154.2 108.42,154.2 125.46,154.2 126.42,154.2 143.46,154.2 144.42,154.2 161.46,154.2 162.42,154.2 179.46,154.2 180.42,154.2 197.46,154.2 198.42,154.2 215.46,154.2 216.42,154.2 233.46,154.2 234.42,154.2

## Silkscreen, mask and mechanical layers (free items; w line width, h text height)
Board Outline (M2):
  the board outline again, w0.254